# Altium PCB main.PcbDoc
Units mm, origin at the board's own origin, x right, y up, seen from the top; angles counter-clockwise.
Board outline 60 x 60 mm, 4 copper layers (Top Layer 1, Top Layer, Bottom Layer, Bottom Layer 1), stack 1.564 mm thick; 70 components, 83 nets, 299 pads, 35 vias.
Unrouted connection lines stored in the file: 109.
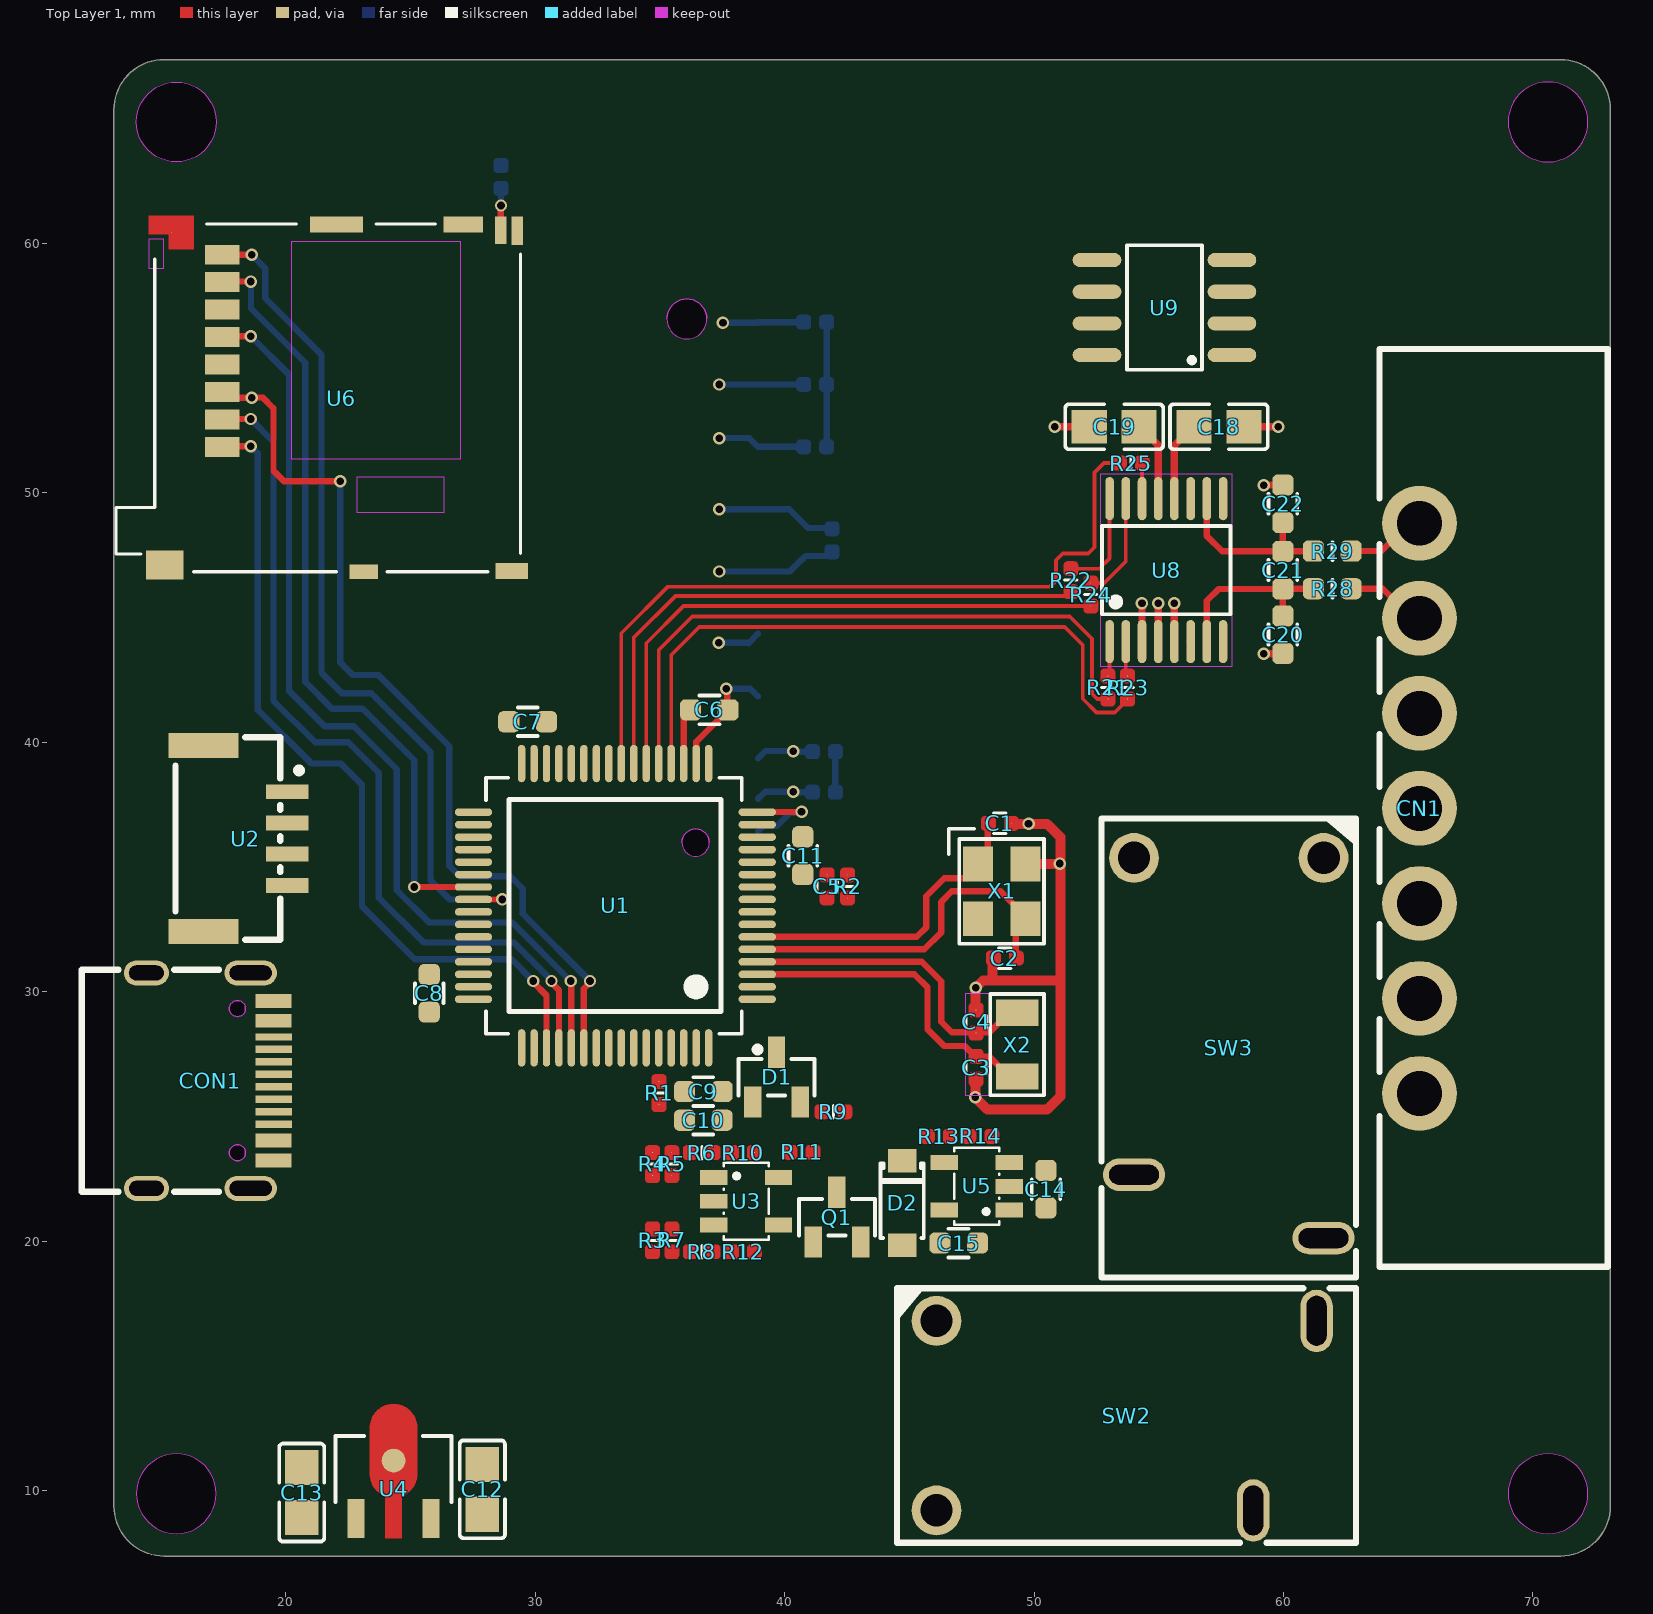
[diagram p0: Top Layer 1 view]
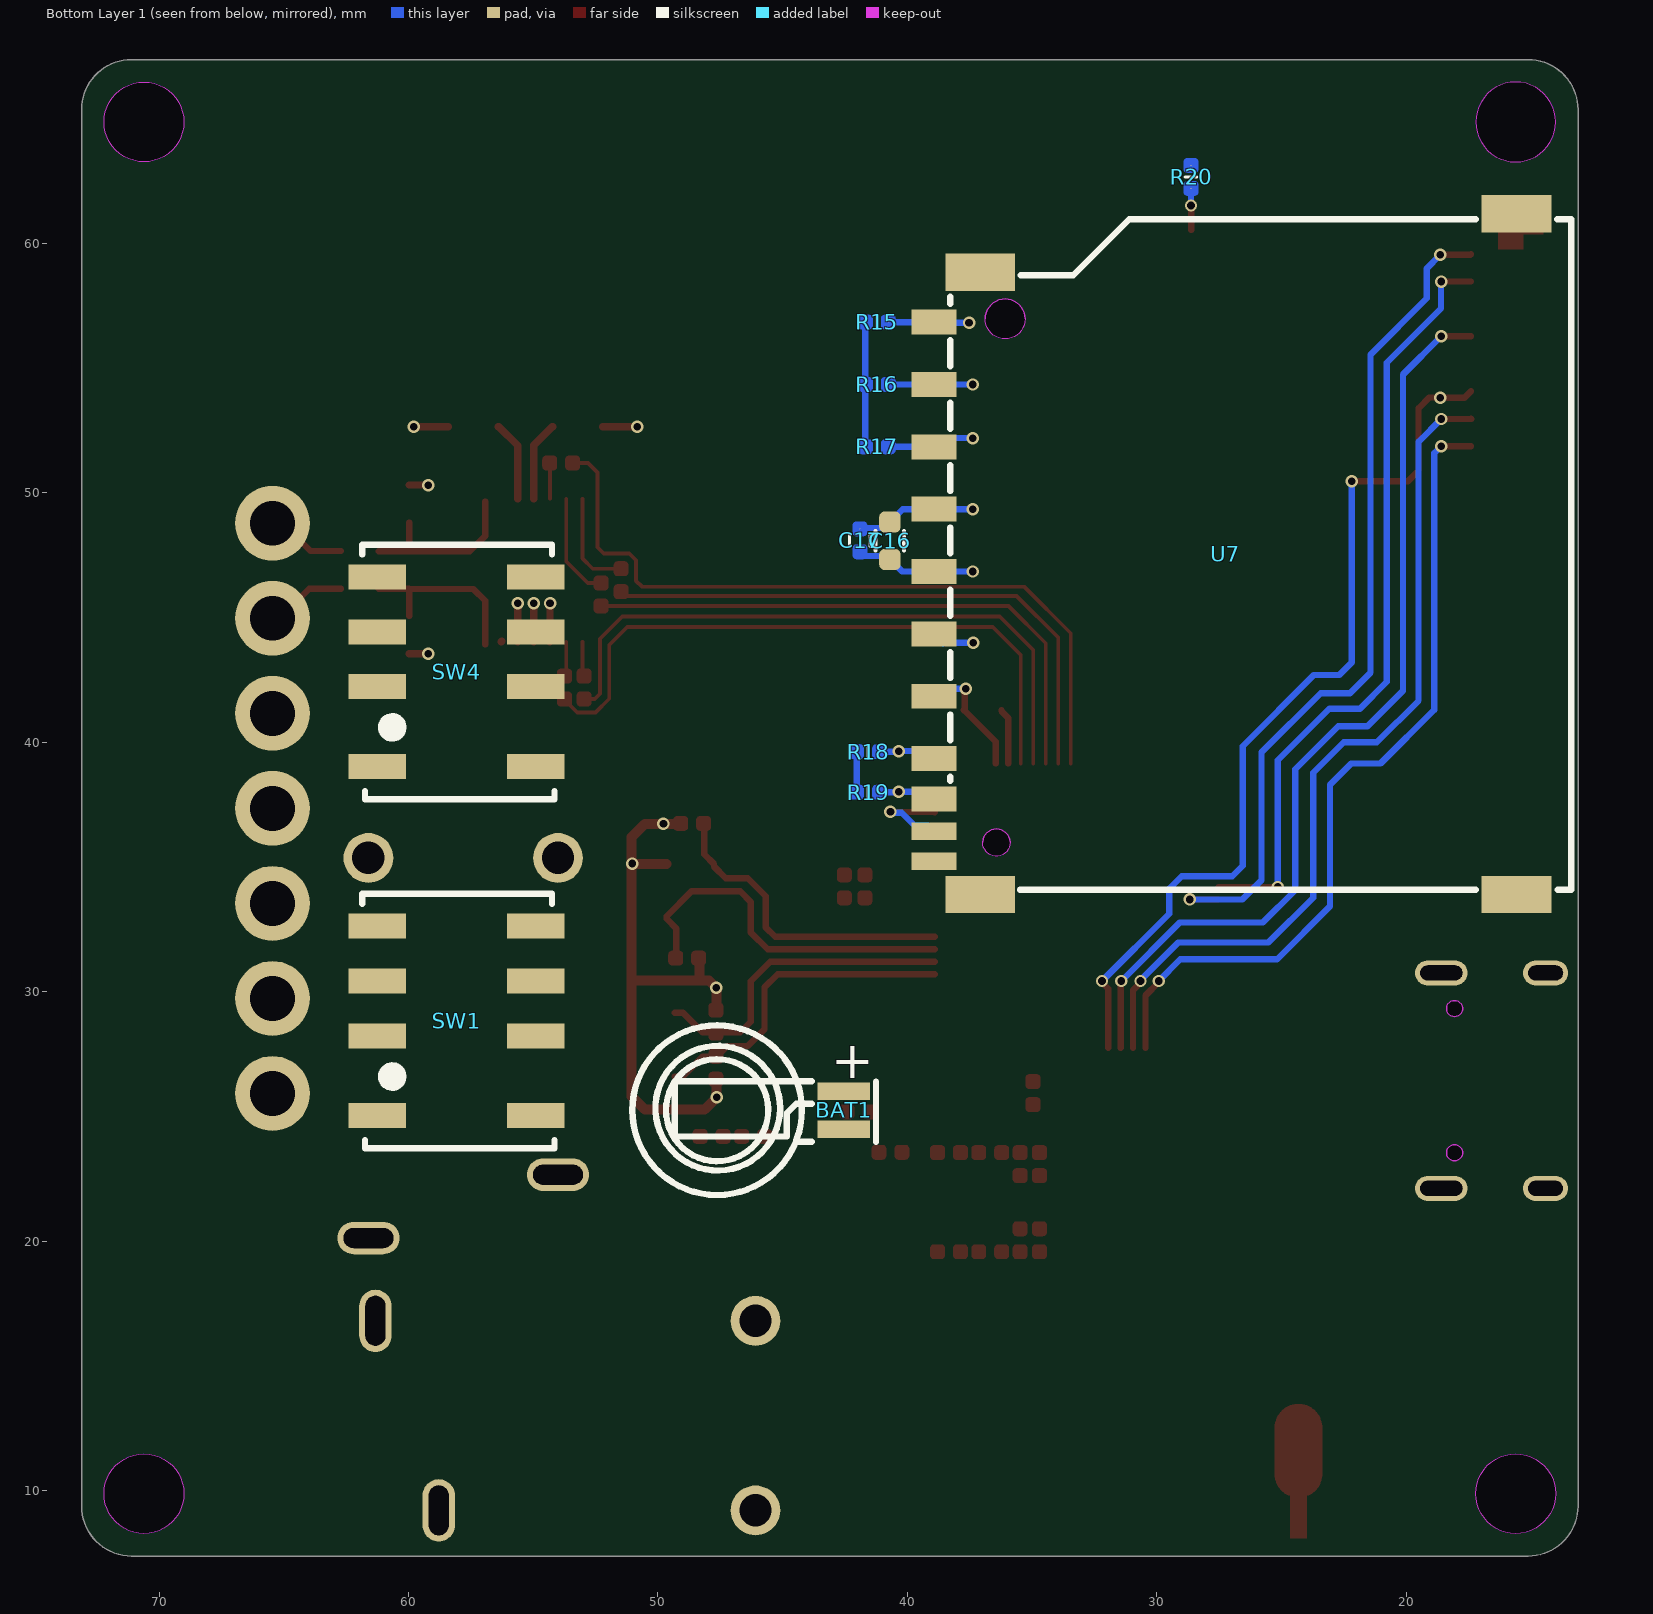
[diagram p1: Bottom Layer 1 view, seen from below]
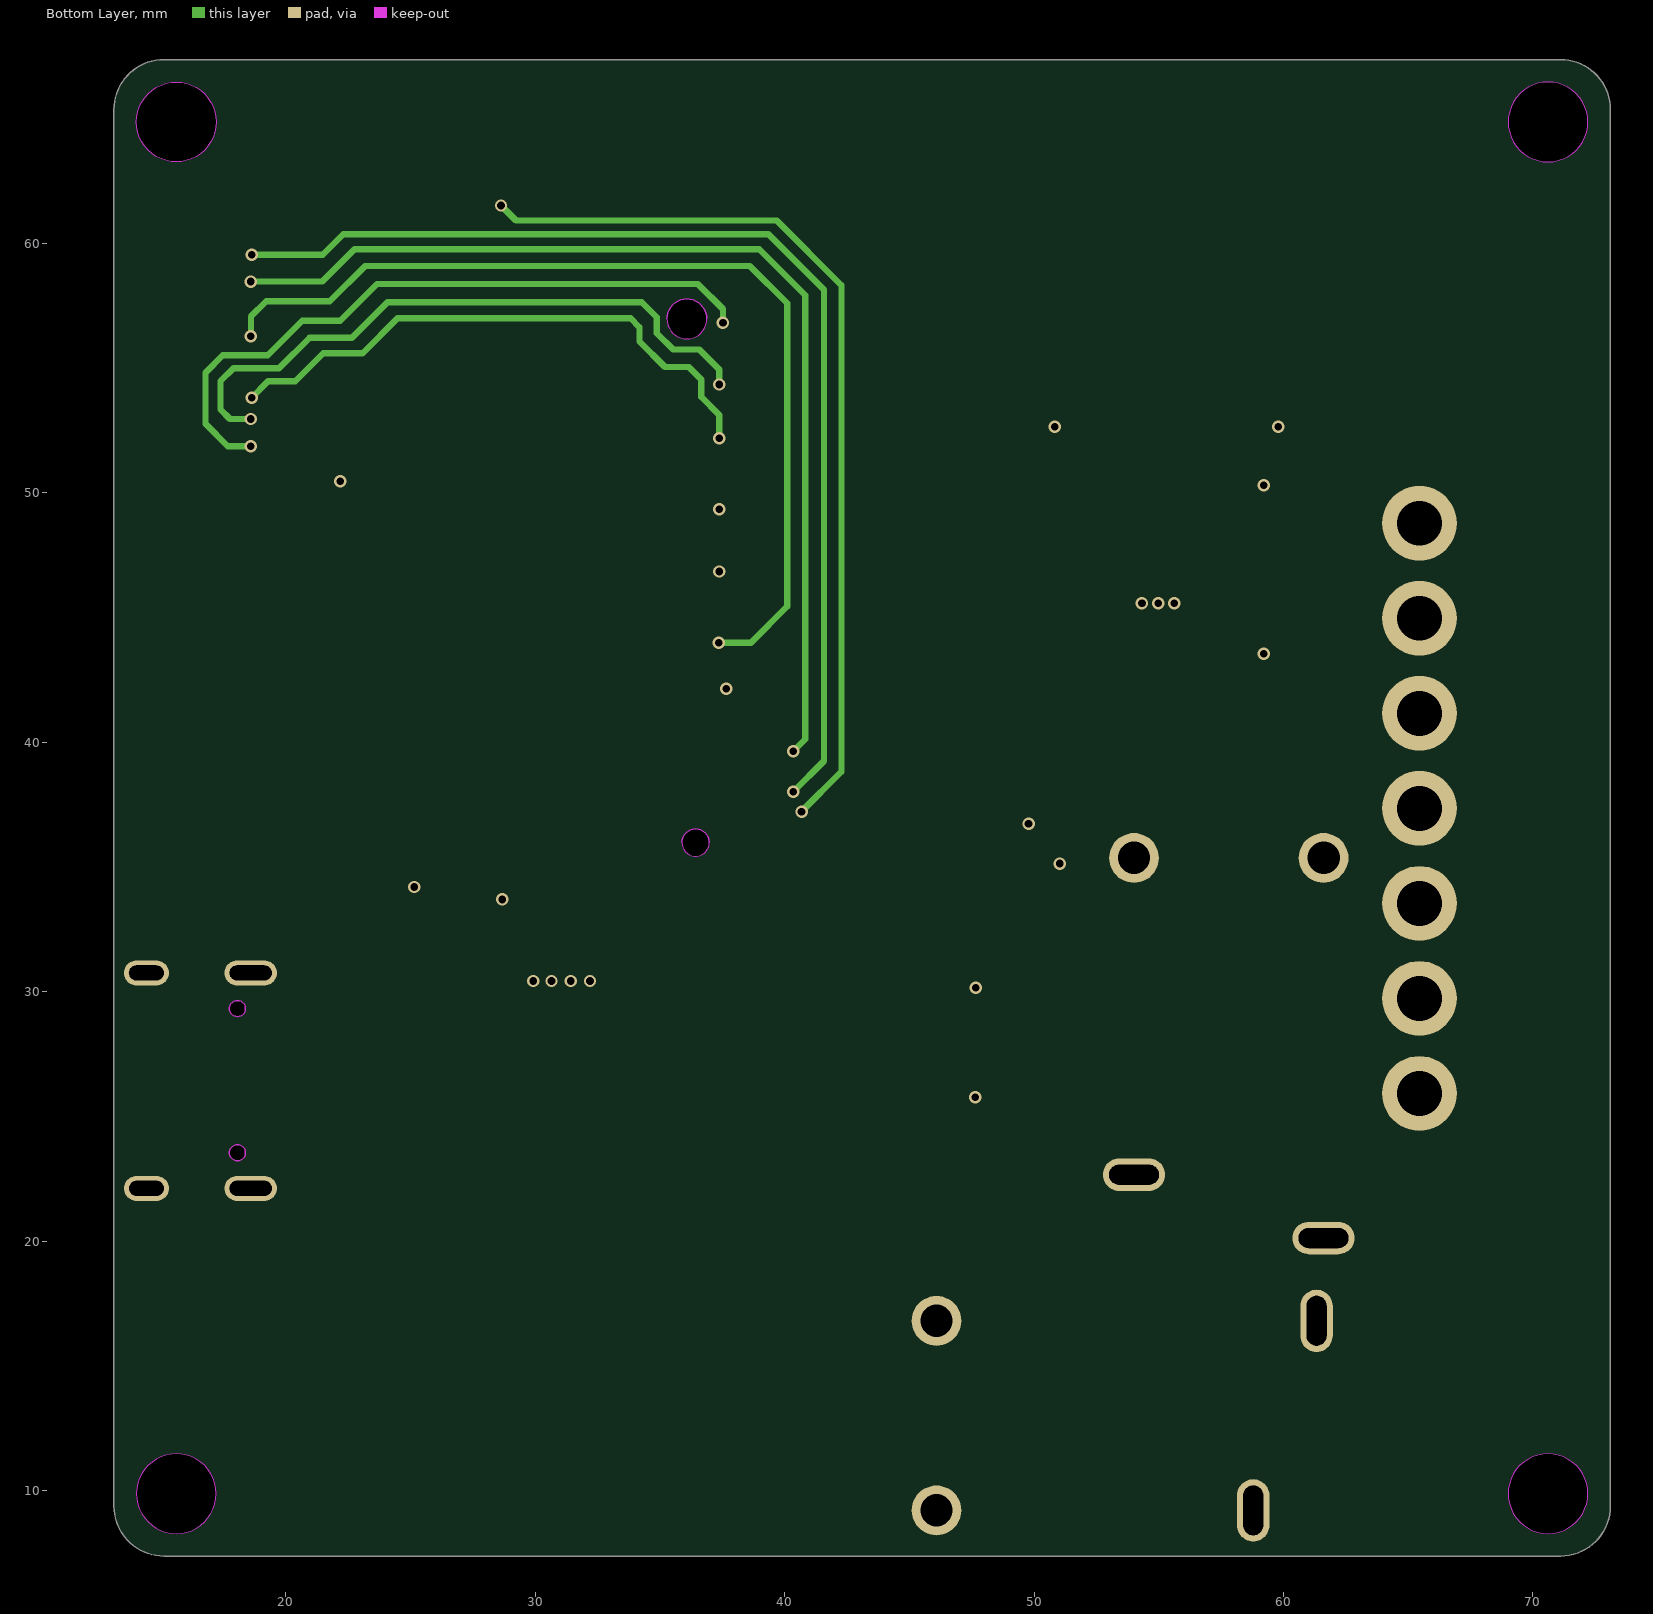
[diagram p2: Bottom Layer]
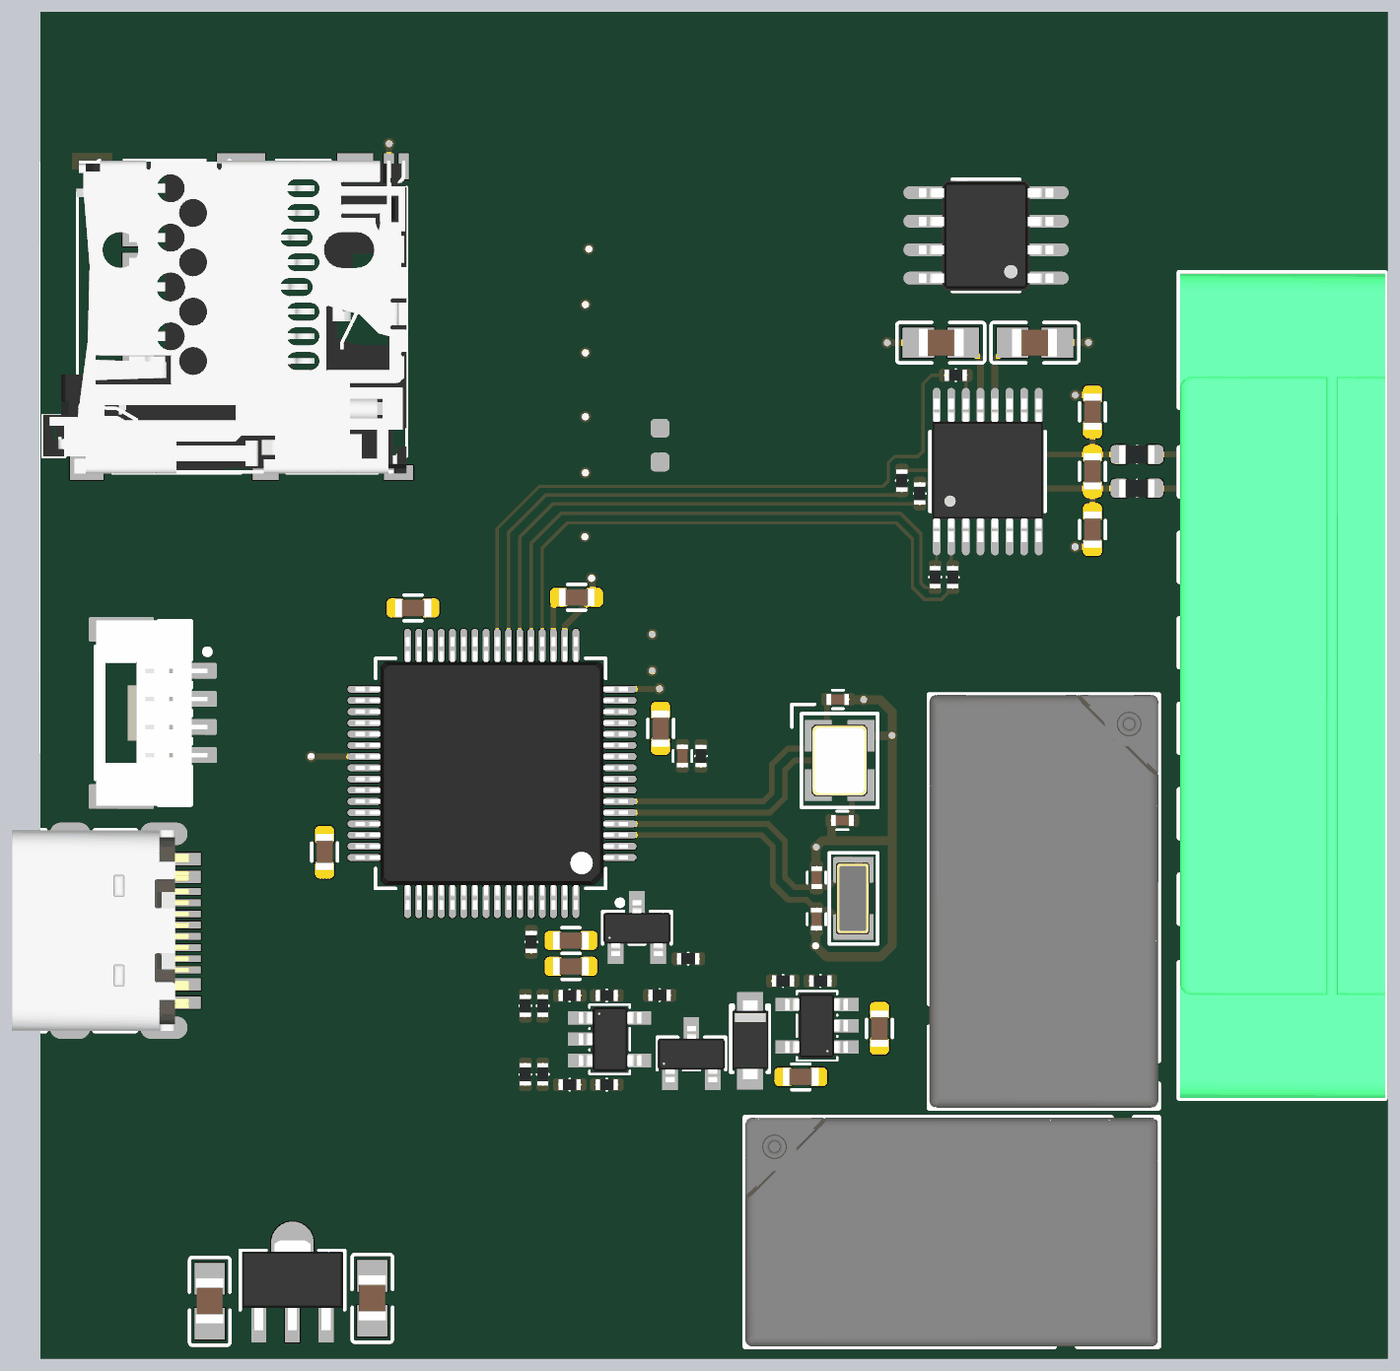
[diagram p3: 3D render of the assembled board from above, using the file's embedded part models]
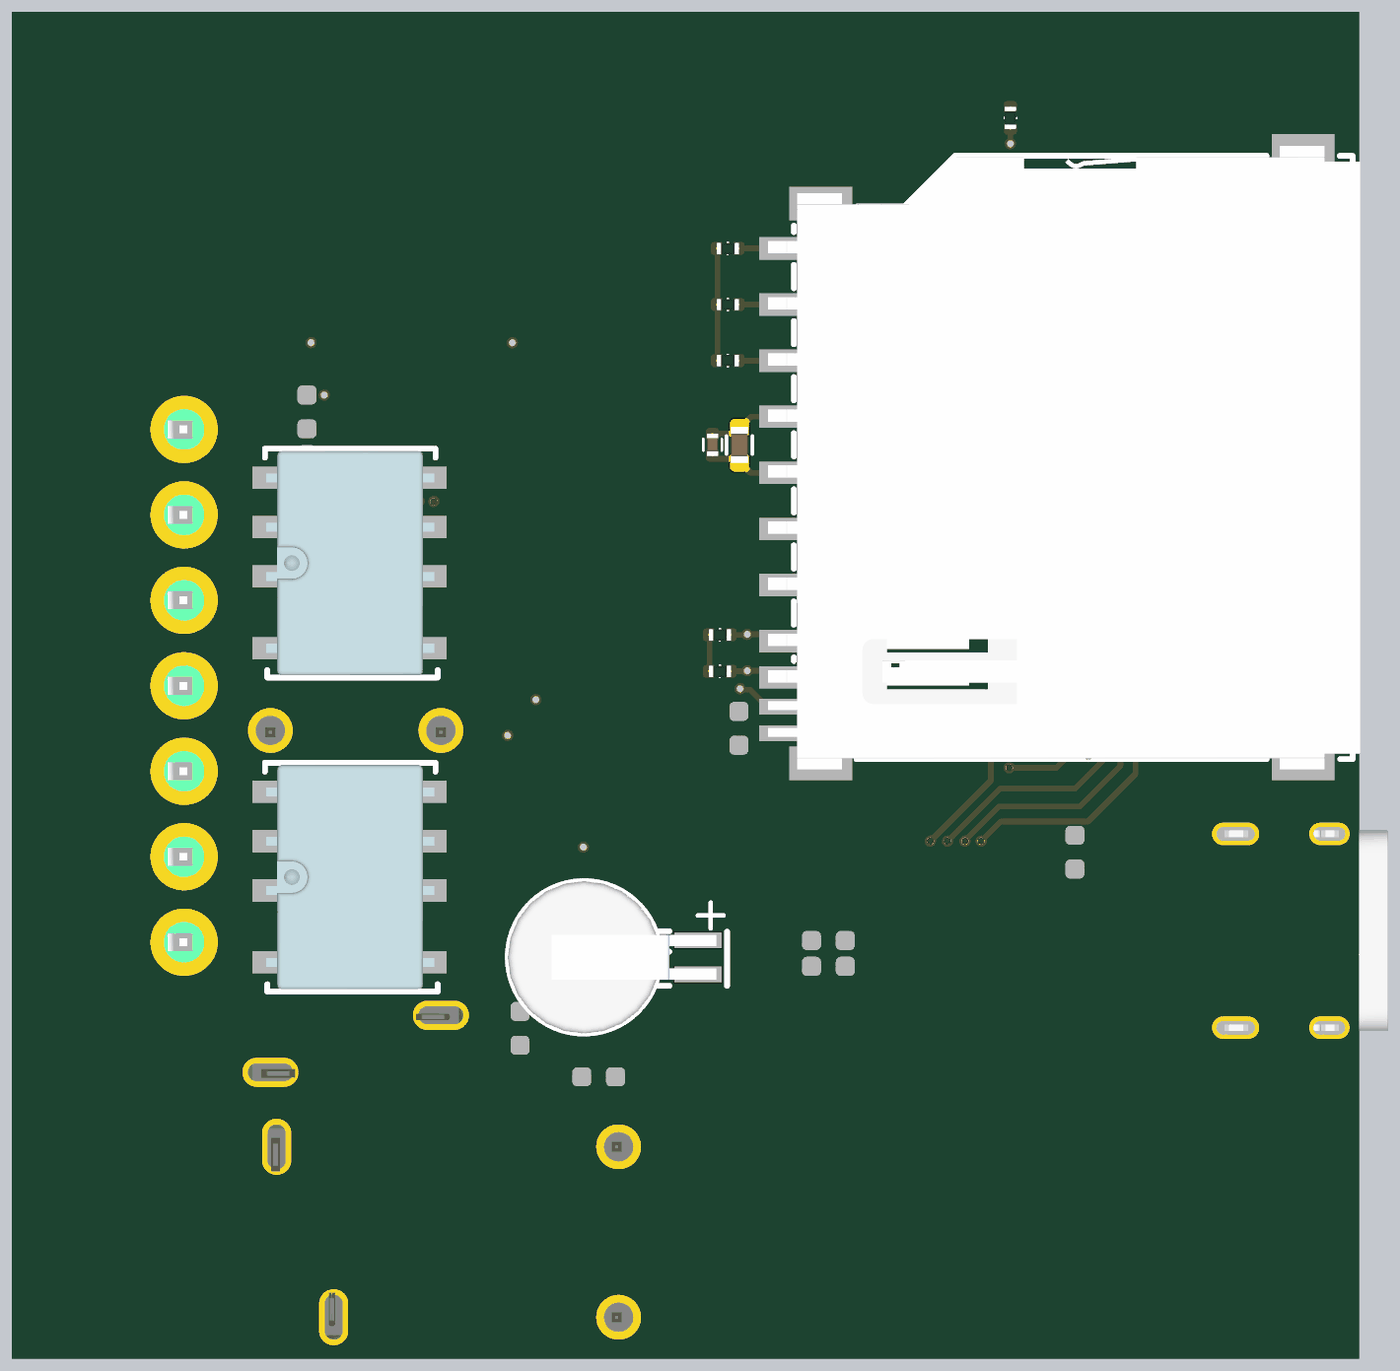
[diagram p4: 3D render of the assembled board from below, using the file's embedded part models]

## Layer stack, top to bottom
Top Solder: solder mask 0.01, Solder Resist, Dk 3.5
Top Layer 1: signal copper 0.035
Dielectric 2: prepreg 0.0994, PP-006, Dk 4.1
Top Layer: signal copper 0.0152
Dielectric 1: dielectric 1.265, FR-4, Dk 4.8
Bottom Layer: signal copper 0.0152
Dielectric 3: prepreg 0.0994, PP-006, Dk 4.1
Bottom Layer 1: signal copper 0.035
Bottom Solder: solder mask 0.01, Solder Resist, Dk 3.5

## Board outline
13.107,9.375 ccw(c15.107,9.375) 15.107,7.375 71.107,7.375 ccw(c71.107,9.375) 73.107,9.375 73.107,65.375 ccw(c71.107,65.375) 71.107,67.375 15.107,67.375 ccw(c15.107,65.375) 13.107,65.375
cut-out: 14.007,9.875 ccw(c15.607,9.875) 15.607,8.275 ccw(c15.607,9.875) 17.207,9.875 ccw(c15.607,9.875) 15.607,11.475 ccw(c15.607,9.875)
cut-out: 14.007,9.875 ccw(c15.607,9.875) 15.607,8.275 ccw(c15.607,9.875) 17.207,9.875 ccw(c15.607,9.875) 15.607,11.475 ccw(c15.607,9.875)
cut-out: 69.007,64.875 ccw(c70.607,64.875) 70.607,63.275 ccw(c70.607,64.875) 72.207,64.875 ccw(c70.607,64.875) 70.607,66.475 ccw(c70.607,64.875)
cut-out: 69.007,9.875 ccw(c70.607,9.875) 70.607,8.275 ccw(c70.607,9.875) 72.207,9.875 ccw(c70.607,9.875) 70.607,11.475 ccw(c70.607,9.875)
cut-out: 15.607,63.275 cw(c15.607,64.875) 14.007,64.875 cw(c15.607,64.875) 15.607,66.475 cw(c15.607,64.875) 17.207,64.875 cw(c15.607,64.875)
cut-out: 69.007,64.875 ccw(c70.607,64.875) 70.607,63.275 ccw(c70.607,64.875) 72.207,64.875 ccw(c70.607,64.875) 70.607,66.475 ccw(c70.607,64.875)
cut-out: 69.007,9.875 ccw(c70.607,9.875) 70.607,8.275 ccw(c70.607,9.875) 72.207,9.875 ccw(c70.607,9.875) 70.607,11.475 ccw(c70.607,9.875)
cut-out: 15.607,63.275 cw(c15.607,64.875) 14.007,64.875 cw(c15.607,64.875) 15.607,66.475 cw(c15.607,64.875) 17.207,64.875 cw(c15.607,64.875)

## Design rules (kind name [scope] priority, off if disabled: settings)
Clearance [All] p1: gap=0.152 ignorepadtopadclearanceinfootprint=FALSE
DiffPairsRouting [All] p1: maxlimit=0.254 minlimit=0.152 mostfreqgap=0.152 toplayer_minwidth=0.381 toplayer_maxwidth=0.381 toplayer_prefwidth=0.381 midlayer1_minwidth=0.381 midlayer1_maxwidth=0.381 midlayer1_prefwidth=0.381 midlayer2_minwidth=0.381 midlayer2_maxwidth=0.381 midlayer2_prefwidth=0.381 bottomlayer_minwidth=0.381 bottomlayer_maxwidth=0.381 bottomlayer_prefwidth=0.381 maxuncoupledlength=12.7
MinimumSolderMaskSliver [All] p1: minsoldermaskwidth=0.152
PolygonConnect [All] p1: connectstyle=Relief reliefconductorwidth=0.254 reliefentries=4 polygonreliefangle="90 Angle" airgapwidth=0.254
RoutingVias [All] p1: holewidth=0.305 width=0.45 viastyle="Through Hole" minholewidth=0.305 minwidth=0.45 maxholewidth=0.711 maxwidth=1.27
SilkToSilkClearance [All] p1: silktosilkclearance=0.152
SolderMaskExpansion [IsVia] p1: expansion=0.102 istentingtop=TRUE
SupplyNets "Schematic Supply Nets_3" [InNet('RTC_POWER')] p1: voltage=0.000
SupplyNets "Schematic Supply Nets_2" [InNet('3V3')] p2: voltage=0.000
SupplyNets "Schematic Supply Nets_1" [InNet('5V')] p3: voltage=0.000
SupplyNets "Schematic Supply Nets" [InNet('GND')] p4: voltage=0.000
Width [All] p1: maxlimit=0.5 minlimit=0.124 preferedwidth=0.254
27 further rules are at their usual default settings.

## Classes and differential pairs
component class power: C12 C13 U4

## Components (designator, comment, footprint, x,y, rotation, side; value= is the part's Value field where it differs from the comment)
BAT1 "MS621FE-FL11E" SMD_FL11E 51.725,25.275 r180 bottom
C1 "12pF" C_0402 48.6,36.724 r0 top
C2 "12pF" C_0402 48.8,31.325 r0 top
C3 "12pF" C_0402 47.7,26.928 r90 top
C4 "12pF" C_0402 47.65,28.831 r270 top
C5 "100nF" C_0402 41.725,34.201 r90 top
C6 "100nF" C_0603 36.988,41.3 r180 top
C7 "100nF" C_0603 29.7,40.825 r180 top
C8 "100nF" C_0603 25.75,29.95 r270 top
C9 "100nF" C_0603 36.725,26 r0 top
C10 "4.7uF" C_0603 36.725,24.85 r0 top
C11 "100nF" C_0603 40.725,35.45 r90 top
C12 "10uF" C_0805 27.873,10.062 r270 top
C13 "10uF" C_0805 20.63,9.933 r270 top
C14 "1uF" C_0603 50.475,22.075 r90 top
C15 "1uF" C_0603 46.966,19.925 r0 top
C16 "10uF" C_0603 40.7,48.093 r270 bottom
C17 "100nF" C_0402 41.875,48.075 r90 bottom
C18 "100nF" C_0805 57.395,52.65 r0 top
C19 "100nF" C_0805 53.225,52.656 r180 top
C20 "4.7nF" C_0603 59.975,44.325 r270 top
C21 "47nF" C_0603 59.975,46.914 r270 top
C22 "4.7nF" C_0603 59.975,49.575 r270 top
CN1 "WJ15EDGRM-3.81-7P" WJ15EDGRM-3.81-7P 65.45,37.355 r90 top locked
CON1 "Type-C-16Pin" Type-C-16Pin 16,26.525 r270 top
D1 "BAT54C" SOT-23 39.675,26.45 r270 top
D2 "DSK14" SOD-123FL 44.725,21.575 r270 top
Q1 "SI2305" SOT-23 42.1,20.837 r270 top
R1 "10K" R_0402 34.961,25.934 r90 top
R2 "10K" R_0402 42.525,34.228 r270 top
R3 "150R" R_0402 34.7,20.032 r90 top
R4 "390R" R_0402 34.7,23.087 r90 top
R5 "15K" R_0402 35.475,23.087 r90 top
R6 "4K7" R_0402 36.678,23.55 r180 top
R7 "1K1" R_0402 35.475,20.038 r270 top
R8 "27K" R_0402 36.678,19.575 r180 top
R9 "200K" R_0402 41.95,25.188 r0 top
R10 "100K" R_0402 38.325,23.55 r0 top
R11 "100K" R_0402 40.675,23.563 r0 top
R12 "100K" R_0402 38.325,19.575 r0 top
R13 "4.3K" R_0402 46.175,24.2 r0 top
R14 "2.7K" R_0402 47.85,24.2 r180 top
R15 "47K" R_0402 41.225,56.85 r180 bottom
R16 "47K" R_0402 41.225,54.35 r180 bottom
R17 "47K" R_0402 41.225,51.85 r180 bottom
R18 "47K" R_0402 41.575,39.625 r180 bottom
R19 "47K" R_0402 41.575,38 r180 bottom
R20 "47K" R_0402 28.625,62.675 r270 bottom
R21 "47K" R_0402 52.959,42.203 r270 top
R22 "47K" R_0402 51.475,46.5 r90 top
R23 "47K" R_0402 53.745,42.2 r270 top
R24 "47K" R_0402 52.275,45.925 r90 top
R25 "47K" R_0402 53.875,51.2 r0 top
R28 "330R" R_0603 61.95,46.151 r0 top
R29 "330R" R_0603 61.95,47.659 r0 top
SW1 "HFD4-X-S" HFD4-X-S 58.075,28.8 r90 bottom
SW2 "HF32FV-16/5-HLTF(590)" HF32FV-16/5-HLTF(590) 53.65,13.125 r0 top
SW3 "HF32FV-16/5-HLTF(590)" HF32FV-16/5-HLTF(590) 57.925,27.801 r270 top
SW4 "HFD4-X-S" HFD4-X-S 58.075,42.8 r90 bottom
U1 "STM32F103R" LQFP_64 33.2,33.45 r90 top
U2 "GH1.25-4PL" GH1.25-4PL 17.925,36.05 r90 top
U3 "LMV331" SOT-23-5P 38.525,21.625 r180 top
U4 "AMS1117-3.3" SOT-89-3P 24.317,11.205 r270 top
U5 "RT9043GB" SOT-23-5P 47.625,22.175 r0 top
U6 "2201778-1" 2201778-1 22.538,53.876 r0 top
U7 "SD" SMD_SD-102 25.825,47.5 r90 bottom locked
U8 "ADS1220IPWR" TSSOP-16 55.3,46.964 r0 top locked
U9 "REF5050AIDR" SOIC-8 55.225,57.475 r90 top
X1 "8Mhz" SMD3225-4P 48.7,34.025 r270 top
X2 "32.768Khz" SMD3215-2P 49.293,27.875 r270 top

## Footprints (in the part's own frame and the unit in brackets; to place one, negate y for a bottom-side part, rotate by r counter-clockwise, add the part's x,y. Pads: shape width x height; smd on the part's side, far side on the other; paste and mask are expansions set on the pad)
2201778-1 [mil]
  rect 55.1x31.5 smd paste+0 mask+2: 1(-200.3,-79.8) 2(-200.3,-36.5) 3(-200.3,6.8) 4(-200.3,50.2) 5(-200.3,93.5) 6(-200.3,136.8) 7(-200.3,180.1) 8(-200.3,223.4)
  rect 17.7x45.3 smd paste+0 mask+2: 9(265.2,261.4)
  rect 17.7x43.3 smd paste+0 mask+2: 10(239.3,262.4)
  round 1 smd: 11(-281,258.4)
  rect 84.3x25.6 smd paste+0 mask+2: 12(-20,271.2)
  rect 63x25.6 smd paste+0 mask+2: 13(180,271.2)
  rect 51.2x25.6 smd paste+0 mask+2: 14(256.4,-276)
  rect 45.3x23.6 smd paste+0 mask+2: 15(23.1,-277)
  rect 59.1x45.7 smd paste+0 mask+2: 16(-290.9,-266)
  Top Layer 1 region: -316.45,255.91 -284.45,255.91 -284.45,231.85 -245.55,231.85 -245.55,284.95 -316.45,284.95
  Top Layer 1 keep-out region: -316.45,201.77 -292.83,201.77 -292.83,248.23 -316.45,248.23
  Top Layer 1 keep-out region: 12.01,-183.15 149.8,-183.15 149.8,-128.03 12.01,-128.03
  Top Layer 1 keep-out region: -91.45,-98.5 176.18,-98.5 176.18,244.02 -91.45,244.02
  silkscreen extent -368,-277 270,272, body extent -368,-278 270,275, height 71
C_0402 [mm]
  round 0.025 smd mask+0.051: 1(-0.435,0.025) 2(0.485,0.025)
  Top Layer 1 region: 0.195,0.164 0.197,0.188 0.202,0.211 0.211,0.233 0.224,0.253 0.239,0.271 0.257,0.286 0.277,0.299 0.299,0.308 0.322,0.313 0.346,0.315 0.624,0.315 0.648,0.313 0.671,0.308 0.693,0.299 0.713,0.286 0.731,0.271 0.746,0.253 0.759,0.233 0.768,0.211 0.773,0.188 0.775,0.164 0.775,-0.114 0.773,-0.138 0.768,-0.161 0.759,-0.183 0.746,-0.203 0.731,-0.221 0.713,-0.236 0.693,-0.249 0.671,-0.258 0.648,-0.263 0.624,-0.265 0.346,-0.265 0.322,-0.263 0.299,-0.258 0.277,-0.249 0.257,-0.236 0.239,-0.221 0.224,-0.203 0.211,-0.183 0.202,-0.161 0.197,-0.138 0.195,-0.114 0.195,0.164
  Top Layer 1 region: -0.725,0.164 -0.723,0.188 -0.718,0.211 -0.709,0.233 -0.696,0.253 -0.681,0.271 -0.663,0.286 -0.643,0.299 -0.621,0.308 -0.598,0.313 -0.574,0.315 -0.296,0.315 -0.272,0.313 -0.249,0.308 -0.227,0.299 -0.207,0.286 -0.189,0.271 -0.174,0.253 -0.161,0.233 -0.152,0.211 -0.147,0.188 -0.145,0.164 -0.145,-0.114 -0.147,-0.138 -0.152,-0.161 -0.161,-0.183 -0.174,-0.203 -0.189,-0.221 -0.207,-0.236 -0.227,-0.249 -0.249,-0.258 -0.272,-0.263 -0.296,-0.265 -0.574,-0.265 -0.598,-0.263 -0.621,-0.258 -0.643,-0.249 -0.663,-0.236 -0.681,-0.221 -0.696,-0.203 -0.709,-0.183 -0.718,-0.161 -0.723,-0.138 -0.725,-0.114 -0.725,0.164
  silkscreen extent -0.22,-0.39 0.28,0.44, body extent -0.47,-0.22 0.53,0.28, height 0.5
C_0603 [mm]
  rrect50% 0.85x0.85 smd paste-100 mask+0.051: 1(0.763,0) 2(-0.743,0)
  silkscreen extent -0.39,-0.58 0.41,0.57, body extent -0.8,-0.4 0.8,0.4, height 0.8
C_0805 [mil]
  rect 55.5x53.1 smd paste-99999 mask+2: 1(-38.87,0.17) 2(39.93,0.17)
  silkscreen extent -77,-35 78,36, body extent -39,-25 39,25, height 49
GH1.25-4PL [mm]
  rect 0.6x1.7 smd paste+0.051: 1(1.969,-2.122) 2(0.719,-2.122) 3(-0.531,-2.122) 4(-1.781,-2.122)
  rect 1x2.8 smd paste+0.051: 5(3.819,1.228) 6(-3.631,1.228)
  silkscreen extent -3.97,-2.71 4.16,2.35, body extent -4.03,-2.6 4.22,2.35, height 4.2
HF32FV-16/5-HLTF(590) [mil]
  round 78.7 hole 51.2: 1(-297.8,-154.3) 2(-297.8,144.9)
  oval 51.2x98.4 hole 31.5 slot 78.7 at 90 deg: 3(302.2,144.9) 4(202.2,-154.3)
  silkscreen extent -360,-206 364,196, body extent -360,-205 364,196, height 622
HFD4-X-S [mm]
  rect 1.001x2.301 smd: 1(-3.77,-3.176) 2(-0.57,-3.176) 3(1.63,-3.176) 4(3.83,-3.176) 5(3.83,3.174) 6(1.63,3.174) 7(-0.57,3.174) 8(-3.77,3.174)
  silkscreen extent -5.08,-3.93 5.13,3.77, body extent -4.97,-3.78 5.03,3.72, height 5.66
LQFP_64 [mm]
  oval 0.3x1.5 smd mask+0.05: 1(-3.75,-5.699) 2(-3.25,-5.699) 3(-2.75,-5.699) 4(-2.25,-5.699) 5(-1.75,-5.699) 6(-1.25,-5.699) 7(-0.75,-5.699) 8(-0.25,-5.699) 9(0.25,-5.699) 10(0.75,-5.699) 11(1.25,-5.699) 12(1.75,-5.699) 13(2.25,-5.699) 14(2.75,-5.699) 15(3.25,-5.699) 16(3.75,-5.699) 33(3.75,5.677) 34(3.25,5.677) 35(2.75,5.677) 36(2.25,5.677) 37(1.75,5.677) 38(1.25,5.677) 39(0.75,5.677) 40(0.25,5.677) 41(-0.25,5.677) 42(-0.75,5.677) 43(-1.25,5.677) 44(-1.75,5.677) 45(-2.25,5.677) 46(-2.75,5.677) 47(-3.25,5.677) 48(-3.75,5.677)
  oval 1.5x0.3 smd mask+0.05: 17(5.7,-3.749) 18(5.7,-3.249) 19(5.7,-2.749) 20(5.7,-2.249) 21(5.7,-1.749) 22(5.7,-1.249) 23(5.7,-0.749) 24(5.7,-0.249) 25(5.7,0.251) 26(5.7,0.751) 27(5.7,1.251) 28(5.7,1.751) 29(5.7,2.251) 30(5.7,2.751) 31(5.7,3.251) 32(5.7,3.751) 49(-5.7,3.751) 50(-5.7,3.251) 51(-5.7,2.751) 52(-5.7,2.251) 53(-5.7,1.751) 54(-5.7,1.251) 55(-5.7,0.751) 56(-5.7,0.251) 57(-5.7,-0.249) 58(-5.7,-0.749) 59(-5.7,-1.249) 60(-5.7,-1.749) 61(-5.7,-2.249) 62(-5.7,-2.749) 63(-5.7,-3.249) 64(-5.7,-3.749)
  silkscreen extent -5.88,-5.82 5.13,5.18, body extent -6.07,-6.07 6.07,6.07, height 1.62
R_0402 [mil]
  round 1 smd mask+2.01: 1(18.23,0.01) 2(-17.99,0.01)
  Top Layer 1 region: -6.58,-5.47 -6.65,-6.4 -6.87,-7.31 -7.22,-8.17 -7.71,-8.96 -8.31,-9.67 -9.02,-10.28 -9.82,-10.76 -10.68,-11.12 -11.58,-11.34 -12.51,-11.41 -23.47,-11.41 -24.4,-11.34 -25.31,-11.12 -26.17,-10.76 -26.96,-10.28 -27.67,-9.67 -28.28,-8.96 -28.76,-8.17 -29.12,-7.31 -29.34,-6.4 -29.41,-5.47 -29.41,5.49 -29.34,6.41 -29.12,7.32 -28.76,8.18 -28.28,8.98 -27.67,9.68 -26.96,10.29 -26.17,10.78 -25.31,11.13 -24.4,11.35 -23.47,11.42 -12.51,11.42 -11.58,11.35 -10.68,11.13 -9.82,10.78 -9.02,10.29 -8.31,9.68 -7.71,8.98 -7.22,8.18 -6.87,7.32 -6.65,6.41 -6.58,5.49 -6.58,-5.47
  Top Layer 1 region: 29.64,-5.47 29.57,-6.4 29.35,-7.31 29,-8.17 28.51,-8.96 27.91,-9.67 27.2,-10.28 26.4,-10.76 25.54,-11.12 24.64,-11.34 23.71,-11.41 12.75,-11.41 11.82,-11.34 10.91,-11.12 10.05,-10.76 9.26,-10.28 8.55,-9.67 7.94,-8.96 7.46,-8.17 7.1,-7.31 6.88,-6.4 6.81,-5.47 6.81,5.49 6.88,6.41 7.1,7.32 7.46,8.18 7.94,8.98 8.55,9.68 9.26,10.29 10.05,10.78 10.91,11.13 11.82,11.35 12.75,11.42 23.71,11.42 24.64,11.35 25.54,11.13 26.4,10.78 27.2,10.29 27.91,9.68 28.51,8.98 29,8.18 29.35,7.32 29.57,6.41 29.64,5.49 29.64,-5.47
  silkscreen extent 0,-10 0,10, body extent -20,-10 20,10, height 14
R_0603 [mil]
  rrect50% 33.5x33.5 smd paste-3937 mask+2: 1(-29.56,0.38) 2(29.84,0.38)
  silkscreen extent 0,-14 0,14, body extent -31,-16 31,16, height 18
SMD3215-2P [mm]
  rect 1.05x1.7 smd paste+0.051: 1(-1.28,0.028) 2(1.27,0.028)
  silkscreen extent -2.03,-1.05 2.02,1.11, body extent -1.6,-0.75 1.6,0.75, height 0.93
SMD3225-4P [mm]
  rect 1.4x1.199 smd: 1(-1.1,-0.95) 2(1.1,-0.95) 3(1.1,0.95) 4(-1.1,0.95)
  silkscreen extent -2.51,-2.12 2.1,1.7, body extent -1.6,-1.25 1.6,1.25, height 0.64
SMD_FL11E [mm]
  rect 2.1x0.7 smd paste+0 mask+0.05: 1(9.179,0.737) 2(9.179,-0.787)
  silkscreen extent 0.7,-3.42 10.47,3.38, body extent 0.71,-3.42 10,3.38, height 2.8
SMD_SD-102 [mil]
  rect 39.4x70.9 smd: 1(269.6,515.8) 2(171.2,515.8) 3(72.8,515.8) 4(-25.6,515.8) 5(-124.1,515.8) 6(-222.5,515.8) 7(-320.9,515.8) 8(-384.7,515.8) 9(368.1,515.8)
  rect 27.6x70.9 smd: 10(-435.9,515.8) 11(-483.1,515.8)
  rect 59.1x110.2 smd: 12(-535.5,443) 13(446.8,443) 14(539.3,-403.5) 15(-535.5,-403.5)
  Keep-Out Layer board cut-out: 404.7,403.6 404.3,398.7 403.2,393.9 401.3,389.3 398.7,385.1 395.5,381.4 391.7,378.1 387.5,375.6 382.9,373.7 378.1,372.5 373.2,372.1 368.3,372.5 363.5,373.7 358.9,375.6 354.7,378.1 350.9,381.4 347.7,385.1 345.1,389.3 343.2,393.9 342.1,398.7 341.7,403.6 342.1,408.5 343.2,413.4 345.1,417.9 347.7,422.1 350.9,425.9 354.7,429.1 358.9,431.7 363.5,433.6 368.3,434.7 373.2,435.1 378.1,434.7 382.9,433.6 387.5,431.7 391.7,429.1 395.5,425.9 398.7,422.1 401.3,417.9 403.2,413.4 404.3,408.5 404.7,403.6
  Keep-Out Layer board cut-out: -431.9,417.4 -432.3,413.3 -433.5,409.4 -435.4,405.7 -437.9,402.5 -441,399.8 -444.6,397.7 -448.5,396.4 -452.6,395.8 -456.7,396 -460.7,396.9 -464.4,398.6 -467.8,401 -470.6,404 -472.8,407.5 -474.4,411.3 -475.1,415.3 -475.1,419.5 -474.4,423.5 -472.8,427.3 -470.6,430.8 -467.8,433.8 -464.4,436.2 -460.7,437.9 -456.7,438.8 -452.6,439 -448.5,438.4 -444.6,437.1 -441,435 -437.9,432.3 -435.4,429.1 -433.5,425.4 -432.3,421.5 -431.9,417.4
  Keep-Out Layer region: 404.7,403.6 404.3,398.7 403.2,393.9 401.3,389.3 398.7,385.1 395.5,381.4 391.7,378.1 387.5,375.6 382.9,373.7 378.1,372.5 373.2,372.1 368.3,372.5 363.5,373.7 358.9,375.6 354.7,378.1 350.9,381.4 347.7,385.1 345.1,389.3 343.2,393.9 342.1,398.7 341.7,403.6 342.1,408.5 343.2,413.4 345.1,417.9 347.7,422.1 350.9,425.9 354.7,429.1 358.9,431.7 363.5,433.6 368.3,434.7 373.2,435.1 378.1,434.7 382.9,433.6 387.5,431.7 391.7,429.1 395.5,425.9 398.7,422.1 401.3,417.9 403.2,413.4 404.3,408.5 404.7,403.6
  Keep-Out Layer region: 404.7,403.6 404.3,398.7 403.2,393.9 401.3,389.3 398.7,385.1 395.5,381.4 391.7,378.1 387.5,375.6 382.9,373.7 378.1,372.5 373.2,372.1 368.3,372.5 363.5,373.7 358.9,375.6 354.7,378.1 350.9,381.4 347.7,385.1 345.1,389.3 343.2,393.9 342.1,398.7 341.7,403.6 342.1,408.5 343.2,413.4 345.1,417.9 347.7,422.1 350.9,425.9 354.7,429.1 358.9,431.7 363.5,433.6 368.3,434.7 373.2,435.1 378.1,434.7 382.9,433.6 387.5,431.7 391.7,429.1 395.5,425.9 398.7,422.1 401.3,417.9 403.2,413.4 404.3,408.5 404.7,403.6
  Keep-Out Layer region: -431.9,417.4 -432.3,413.3 -433.5,409.4 -435.4,405.7 -437.9,402.5 -441,399.8 -444.6,397.7 -448.5,396.4 -452.6,395.8 -456.7,396 -460.7,396.9 -464.4,398.6 -467.8,401 -470.6,404 -472.8,407.5 -474.4,411.3 -475.1,415.3 -475.1,419.5 -474.4,423.5 -472.8,427.3 -470.6,430.8 -467.8,433.8 -464.4,436.2 -460.7,437.9 -456.7,438.8 -452.6,439 -448.5,438.4 -444.6,437.1 -441,435 -437.9,432.3 -435.4,429.1 -433.5,425.4 -432.3,421.5 -431.9,417.4
  Keep-Out Layer region: -431.9,417.4 -432.3,413.3 -433.5,409.4 -435.4,405.7 -437.9,402.5 -441,399.8 -444.6,397.7 -448.5,396.4 -452.6,395.8 -456.7,396 -460.7,396.9 -464.4,398.6 -467.8,401 -470.6,404 -472.8,407.5 -474.4,411.3 -475.1,415.3 -475.1,419.5 -474.4,423.5 -472.8,427.3 -470.6,430.8 -467.8,433.8 -464.4,436.2 -460.7,437.9 -456.7,438.8 -452.6,439 -448.5,438.4 -444.6,437.1 -441,435 -437.9,432.3 -435.4,429.1 -433.5,425.4 -432.3,421.5 -431.9,417.4
  Keep-Out Layer lines w0.1: 373.2,372.1 368.3,372.5 363.5,373.7 358.9,375.6 354.7,378.1 350.9,381.4 347.7,385.1 345.1,389.3 343.2,393.9 342.1,398.7 341.7,403.6 342.1,408.5 343.2,413.4 345.1,417.9 347.7,422.1 350.9,425.9 354.7,429.1 358.9,431.7 363.5,433.6 368.3,434.7 373.2,435.1 378.1,434.7 382.9,433.6 387.5,431.7 391.7,429.1 395.5,425.9 398.7,422.1 401.3,417.9 403.2,413.4 404.3,408.5 404.7,403.6 404.3,398.7 403.2,393.9 401.3,389.3 398.7,385.1 395.5,381.4 391.7,378.1 387.5,375.6 382.9,373.7 378.1,372.5 373.2,372.1 ; -452.6,395.8 -456.7,396 -460.7,396.9 -464.4,398.6 -467.8,401 -470.6,404 -472.8,407.5 -474.4,411.3 -475.1,415.3 -475.1,419.5 -474.4,423.5 -472.8,427.3 -470.6,430.8 -467.8,433.8 -464.4,436.2 -460.7,437.9 -456.7,438.8 -452.6,439 -448.5,438.4 -444.6,437.1 -441,435 -437.9,432.3 -435.4,429.1 -433.5,425.4 -432.3,421.5 -431.9,417.4 -432.3,413.3 -433.5,409.4 -435.4,405.7 -437.9,402.5 -441,399.8 -444.6,397.7 -448.5,396.4 -452.6,395.8
  silkscreen extent -528,-490 531,490, body extent -546,-504 548,535, height 118
SOD-123FL [mm]
  rect 0.95x1.151 smd: 1(-1.65,-0.015) 2(1.736,-0.015)
  silkscreen extent -1.54,-0.88 1.45,0.85, body extent -1.75,-0.8 1.75,0.8, height 1.1
SOIC-8 [mm]
  oval 0.569x1.951 smd: 1(-1.946,-2.708) 2(-0.676,-2.708) 3(0.594,-2.708) 4(1.864,-2.708) 5(1.864,2.703) 6(0.594,2.703) 7(-0.676,2.703) 8(-1.946,2.703)
  silkscreen extent -2.54,-1.5 2.46,1.5, body extent -2.5,-3 2.4,3, height 1.75
SOT-23 [mm]
  rect 1.25x0.701 smd: 1(0.877,-0.953) 2(0.877,0.947) 3(-1.122,-0.003)
  silkscreen extent -0.85,-1.53 0.61,1.52, body extent -1.35,-1.5 1.15,1.5, height 1.2
SOT-23-5P [mil]
  rect 43.3x23.6 smd: 1(54,-36.4) 2(54,1) 3(54,38.4) 4(-48.3,38.4) 5(-48.3,-36.4)
  silkscreen extent -33,-60 38,62, body extent -53,-56 57,58, height 61
SOT-89-3P [mil]
  rect 62x26.5 smd: 1(91.5,-59.1) 3(91.5,59)
  round 37.4 smd: 2(0,0)
  Top Layer 1 region: -51.8,37.4 21.2,37.4 22.9,37.3 24.7,37.2 26.4,37 28.2,36.7 29.9,36.3 31.6,35.9 33.2,35.4 34.9,34.8 36.5,34.1 38.1,33.3 39.6,32.5 41.1,31.6 42.6,30.6 44,29.6 45.4,28.5 46.7,27.3 47.9,26.1 49.1,24.8 50.3,23.5 51.3,22.1 52.3,20.7 53.3,19.2 54.1,17.6 54.9,16.1 55.7,13 122.5,13 122.5,-13 55.7,-13 54.9,-16.1 54.1,-17.7 53.3,-19.2 52.3,-20.7 51.3,-22.2 50.3,-23.5 49.1,-24.9 47.9,-26.2 46.7,-27.4 45.4,-28.6 44,-29.7 42.6,-30.7 41.1,-31.7 39.6,-32.6 38.1,-33.4 36.5,-34.1 34.9,-34.8 33.2,-35.4 31.6,-36 29.9,-36.4 28.2,-36.8 26.4,-37.1 24.7,-37.3 22.9,-37.4 21.2,-37.4 -51.8,-37.4 -53.6,-37.4 -55.3,-37.3 -57.1,-37.1 -58.8,-36.8 -60.5,-36.4 -62.2,-36 -63.9,-35.4 -65.5,-34.8 -67.1,-34.1 -68.7,-33.4 -70.3,-32.6 -71.8,-31.7 -73.2,-30.7 -74.6,-29.7 -76,-28.6 -77.3,-27.4 -78.6,-26.2 -79.8,-24.9 -80.9,-23.5 -82,-22.2 -83,-20.7 -83.9,-19.2 -84.8,-17.7 -85.6,-16.1 -86.3,-14.5 -86.9,-12.9 -87.5,-11.3 -88,-9.6 -88.4,-7.9 -88.7,-6.1 -89,-4.4 -89.1,-2.7 -89.2,-0.9 -89.2,0.8 -89.1,2.6 -89,4.3 -88.7,6.1 -88.4,7.8 -88,9.5 -87.5,11.2 -86.9,12.9 -86.3,14.5 -85.6,16.1 -84.8,17.6 -83.9,19.2 -83,20.7 -82,22.1 -80.9,23.5 -79.8,24.8 -78.6,26.1 -77.3,27.3 -76,28.5 -74.6,29.6 -73.2,30.6 -71.8,31.6 -70.3,32.5 -68.7,33.3 -67.1,34.1 -65.5,34.8 -63.9,35.4 -62.2,35.9 -60.5,36.3 -58.8,36.7 -57.1,37 -55.3,37.2 -53.6,37.3 -51.8,37.4
  silkscreen extent -39,-92 66,92, body extent -56,-89 101,89, height 60
TSSOP-16 [mil]
  oval 13.5x68.2 smd: 1(-89.5,-115.2) 2(-63.9,-115.2) 3(-38.3,-115.2) 4(-12.7,-115.2) 5(12.8,-115.2) 6(38.4,-115.2) 7(64,-115.2) 8(89.6,-115.2) 9(89.6,110.5) 10(64,110.5) 11(38.4,110.5) 12(12.8,110.5) 13(-12.7,110.5) 14(-38.3,110.5) 15(-63.9,110.5) 16(-89.5,110.5)
  silkscreen extent -101,-72 101,67, body extent -98,-126 98,126, height 43
Type-C-16Pin [mil]
  oval 39.4x82.7 hole 23.6 slot 66.9 at 90 deg: 1(-166.5,101.9) 2(173.6,101.9)
  oval 39.4x70.9 hole 23.6 slot 55.1 at 90 deg: 3(-166.5,-62.7) 4(173.6,-62.6)
  rect 21.7x57.1 smd paste-3937 mask+2: A1B12(-122.4,138.1) A4B9(-90.9,138.1) B1A12(129.5,138.1) B4A9(98,138.1)
  rect 11.8x57.1 smd paste-3937 mask+2: A5(-45.7,138.2) A6(-6.3,138.2) A7(13.4,138.2) A8(52.8,138.2) B5(72.4,138.2) B6(33.1,138.2) B7(-26,138.2) B8(-65.4,138.2)
  Keep-Out Layer board cut-out: -97.4,81 -97.8,78 -98.9,75.1 -100.7,72.6 -103,70.5 -105.7,69.1 -108.7,68.3 -111.8,68.3 -114.8,69.1 -117.5,70.5 -119.8,72.6 -121.6,75.1 -122.7,78 -123,81 -122.7,84.1 -121.6,87 -119.8,89.5 -117.5,91.6 -114.8,93 -111.8,93.7 -108.7,93.7 -105.7,93 -103,91.6 -100.7,89.5 -98.9,87 -97.8,84.1 -97.4,81
  Keep-Out Layer board cut-out: 130.1,81 129.7,78 128.7,75.1 126.9,72.6 124.6,70.5 121.9,69.1 118.9,68.3 115.8,68.3 112.8,69.1 110.1,70.5 107.7,72.6 106,75.1 104.9,78 104.5,81 104.9,84.1 106,87 107.7,89.5 110.1,91.6 112.8,93 115.8,93.7 118.9,93.7 121.9,93 124.6,91.6 126.9,89.5 128.7,87 129.7,84.1 130.1,81
  Keep-Out Layer region: -97.4,81 -97.8,78 -98.9,75.1 -100.7,72.6 -103,70.5 -105.7,69.1 -108.7,68.3 -111.8,68.3 -114.8,69.1 -117.5,70.5 -119.8,72.6 -121.6,75.1 -122.7,78 -123,81 -122.7,84.1 -121.6,87 -119.8,89.5 -117.5,91.6 -114.8,93 -111.8,93.7 -108.7,93.7 -105.7,93 -103,91.6 -100.7,89.5 -98.9,87 -97.8,84.1 -97.4,81
  Keep-Out Layer region: -97.4,81 -97.8,78 -98.9,75.1 -100.7,72.6 -103,70.5 -105.7,69.1 -108.7,68.3 -111.8,68.3 -114.8,69.1 -117.5,70.5 -119.8,72.6 -121.6,75.1 -122.7,78 -123,81 -122.7,84.1 -121.6,87 -119.8,89.5 -117.5,91.6 -114.8,93 -111.8,93.7 -108.7,93.7 -105.7,93 -103,91.6 -100.7,89.5 -98.9,87 -97.8,84.1 -97.4,81
  Keep-Out Layer region: 130.1,81 129.7,78 128.7,75.1 126.9,72.6 124.6,70.5 121.9,69.1 118.9,68.3 115.8,68.3 112.8,69.1 110.1,70.5 107.7,72.6 106,75.1 104.9,78 104.5,81 104.9,84.1 106,87 107.7,89.5 110.1,91.6 112.8,93 115.8,93.7 118.9,93.7 121.9,93 124.6,91.6 126.9,89.5 128.7,87 129.7,84.1 130.1,81
  Keep-Out Layer region: 130.1,81 129.7,78 128.7,75.1 126.9,72.6 124.6,70.5 121.9,69.1 118.9,68.3 115.8,68.3 112.8,69.1 110.1,70.5 107.7,72.6 106,75.1 104.9,78 104.5,81 104.9,84.1 106,87 107.7,89.5 110.1,91.6 112.8,93 115.8,93.7 118.9,93.7 121.9,93 124.6,91.6 126.9,89.5 128.7,87 129.7,84.1 130.1,81
  Keep-Out Layer region: -119.8,72.6 -117.5,70.5 -114.8,69.1 -111.8,68.3 -108.7,68.3 -105.7,69.1 -103,70.5 -100.7,72.6 -98.9,75.1 -97.8,78 -97.4,81 -97.8,84.1 -98.9,87 -100.7,89.5 -103,91.6 -105.7,93 -108.7,93.7 -111.8,93.7 -114.8,93 -117.5,91.6 -119.8,89.5 -121.6,87 -122.7,84.1 -123,81 -122.7,78 -121.6,75.1
  Keep-Out Layer region: 107.7,72.6 110.1,70.5 112.8,69.1 115.8,68.3 118.9,68.3 121.9,69.1 124.6,70.5 126.9,72.6 128.7,75.1 129.7,78 130.1,81 129.7,84.1 128.7,87 126.9,89.5 124.6,91.6 121.9,93 118.9,93.7 115.8,93.7 112.8,93 110.1,91.6 107.7,89.5 106,87 104.9,84.1 104.5,81 104.9,78 106,75.1
  Keep-Out Layer lines w0.1: 118.9,68.3 121.9,69.1 ; 118.9,68.3 115.8,68.3 ; 118.9,68.3 115.8,68.3 ; 118.9,68.3 121.9,69.1 ; 115.8,68.3 112.8,69.1 ; 115.8,68.3 112.8,69.1 ; -108.7,68.3 -105.7,69.1 ; -108.7,68.3 -111.8,68.3 ; -108.7,68.3 -111.8,68.3 ; -108.7,68.3 -105.7,69.1 ; -111.8,68.3 -114.8,69.1 ; -111.8,68.3 -114.8,69.1 ; 121.9,69.1 124.6,70.5 ; 121.9,69.1 124.6,70.5 ; 112.8,69.1 110.1,70.5 ; 112.8,69.1 110.1,70.5 ; -105.7,69.1 -103,70.5 ; -105.7,69.1 -103,70.5 ; -114.8,69.1 -117.5,70.5 ; -114.8,69.1 -117.5,70.5 ; 124.6,70.5 126.9,72.6 ; 124.6,70.5 126.9,72.6 ; 110.1,70.5 107.7,72.6 ; 110.1,70.5 107.7,72.6 ; -103,70.5 -100.7,72.6 ; -103,70.5 -100.7,72.6 ; -117.5,70.5 -119.8,72.6 ; -117.5,70.5 -119.8,72.6 ; 126.9,72.6 128.7,75.1 ; 126.9,72.6 128.7,75.1 ; 107.7,72.6 106,75.1 ; 107.7,72.6 106,75.1 ; -100.7,72.6 -98.9,75.1 ; -100.7,72.6 -98.9,75.1 ; -119.8,72.6 -121.6,75.1 ; -119.8,72.6 -121.6,75.1 ; 128.7,75.1 129.7,78 ; 128.7,75.1 129.7,78 ; 106,75.1 104.9,78 ; 106,75.1 104.9,78 ; -98.9,75.1 -97.8,78 ; -98.9,75.1 -97.8,78 ; -121.6,75.1 -122.7,78 ; -121.6,75.1 -122.7,78 ; 129.7,78 130.1,81 ; 129.7,78 130.1,81 ; 104.9,78 104.5,81 ; 104.9,78 104.5,81 ; -97.8,78 -97.4,81 ; -97.8,78 -97.4,81 ; -122.7,78 -123,81 ; -122.7,78 -123,81 ; 130.1,81 129.7,84.1 ; 130.1,81 129.7,84.1 ; 104.5,81 104.9,84.1 ; 104.5,81 104.9,84.1 ; -97.4,81 -97.8,84.1 ; -97.4,81 -97.8,84.1 ; -123,81 -122.7,84.1 ; -123,81 -122.7,84.1 ; 129.7,84.1 128.7,87 ; 129.7,84.1 128.7,87 ; 104.9,84.1 106,87 ; 104.9,84.1 106,87 ; -97.8,84.1 -98.9,87 ; -97.8,84.1 -98.9,87 ; -122.7,84.1 -121.6,87 ; -122.7,84.1 -121.6,87 ; 128.7,87 126.9,89.5 ; 128.7,87 126.9,89.5 ; 106,87 107.7,89.5 ; 106,87 107.7,89.5 ; -98.9,87 -100.7,89.5 ; -98.9,87 -100.7,89.5 ; -121.6,87 -119.8,89.5 ; -121.6,87 -119.8,89.5 ; 126.9,89.5 124.6,91.6 ; 126.9,89.5 124.6,91.6 ; 107.7,89.5 110.1,91.6 ; 107.7,89.5 110.1,91.6 ; -100.7,89.5 -103,91.6 ; -100.7,89.5 -103,91.6 ; -119.8,89.5 -117.5,91.6 ; -119.8,89.5 -117.5,91.6 ; 124.6,91.6 121.9,93 ; 124.6,91.6 121.9,93 ; 110.1,91.6 112.8,93 ; 110.1,91.6 112.8,93 ; -103,91.6 -105.7,93 ; -103,91.6 -105.7,93 ; -117.5,91.6 -114.8,93 ; -117.5,91.6 -114.8,93 ; 121.9,93 118.9,93.7 ; 121.9,93 118.9,93.7 ; 112.8,93 115.8,93.7 ; 112.8,93 115.8,93.7 ; -105.7,93 -108.7,93.7 ; -105.7,93 -108.7,93.7 ; -114.8,93 -111.8,93.7 ; -114.8,93 -111.8,93.7 ; 118.9,93.7 115.8,93.7 ; 118.9,93.7 115.8,93.7 ; -108.7,93.7 -111.8,93.7 ; -108.7,93.7 -111.8,93.7
  silkscreen extent -172,-165 179,52, body extent -173,-166 180,145, height 126
WJ15EDGRM-3.81-7P [mm]
  round 3 hole 1.801: 1(-11.43,0) 2(-7.62,0) 3(-3.81,0) 4(0,0) 5(3.81,0) 6(7.62,0) 7(11.43,0)
  silkscreen extent -18.37,-7.55 18.41,1.6, body extent -18.37,-7.57 18.37,1.57, height 7.3

## Part data
C1 C2 C3 C4 C5 C6 C7 C8 C9 C10 C11 C12 C13 C14 C15 C16 C17 C18 C19 C20 C21 C22: library part C_MLCC
D1: "SOT-23"
Q1: "p-mos"
R1 R2 R3 R4 R5 R6 R7 R8 R9 R10 R11 R12 R13 R14 R15 R16 R17 R18 R19 R20 R21 R22 R23 R24 R25 R28 R29: library part R_SMD
SW1 SW2 SW3 SW4: "继电器"
U1: library part STM32F103Rx, "64-pin LQFP"
U3: library part LMV331IDBVR, "LMV331IDBVR"
U5: "LDO"
U6: "TF卡槽"
U7: library part 长体SD卡槽, "长体SD卡槽"
U8: "24Bit ADC"
X1: library part Crystal_SMD3225-4P
X2: library part Crystal_3215-2P

## Via types
v1: diameter 0.5, hole 0.305, Top Layer 1 to Bottom Layer 1, tented both sides, 35 vias

## Nets (pads, with @x,y where several pads share a name; then routed paths per layer and width w, separated by ;. In a path a pad name is that pad's centre, name@x,y a point inside that pad or via, vN(x,y) a via of type N, cw(c..) or ccw(c..) an arc to the next point about the centre after c; other vN are vias at no path point)
3V3: C6.1 C7.1 C8.1 C9.1 C10.1 C11.1 C13.1 C16.1 C17.1 D1.1 R2.2 R3.1 R11.2 R15.2 R16.2 R17.2 R18.2 R19.2 R20.2 U1.13 U1.19 U1.32 U1.48 U1.64 U3.5 U4.2 U6.4 U7.4 | length 13.7
  Top Layer 1 w0.254: U1.19 35.949,40.978 36.225,41.254 C6.1
  Bottom Layer 1 w0.254: v1(37.375,46.85) U7.4 40.208,46.85 40.688,47.33 C16.1 40.845,47.475 41.735,47.475 C17.1 ; R17.2 R15.2 ; R19.2 R18.2
5V: C12.1 C14.2 C18.1 C19.1 U4.3 U5.1 U5.3 U8.12 U8.13 | length 6.4
  Top Layer 1 w0.3: C19.1 54.243,52.652 54.977,51.917 U8.13 ; U8.12 55.625,51.902 56.377,52.654 C18.1
ADS_CS: R23.1 U1.20 | length 26
  Top Layer 1 w0.15: U1.20 35.449,43.499 36.57,44.62 51.23,44.62 51.95,43.9 51.95,41.75 52.5,41.2 53.232,41.2 53.745,41.713 R23.1
ADS_DRDY: R25.2 U1.24 | length 30.3
  Top Layer 1 w0.15: U1.24 33.449,44.374 35.318,46.243 50.643,46.243 50.875,46.475 50.875,47.3 51.15,47.575 52.175,47.575 52.425,47.825 52.425,50.825 52.8,51.2 R25.2
AIN0: SW4.4 SW4.5 U8.11
AIN1: C21.2 C22.1 R29.1 U8.10 | length 7.1
  Top Layer 1 w0.254: U8.10@56.926,49.657 56.926,48.274 57.542,47.658 C21.2 ; C22.1 C21.2 ; R29.1 61.194,47.663 59.981,47.663 C21.2
AIN2: C20.2 C21.1 R28.1 U8.7 | length 7.3
  Top Layer 1 w0.254: U8.7@56.926,43.924 56.926,45.676 57.401,46.151 C21.1 ; C20.2 C21.1 ; R28.1 61.194,46.156 59.98,46.156 C21.1
GND: BAT1.2 C1.2 C2.1 C3.1 C4.1 C5.2 C6.2 C7.2 C8.2 C9.2 C10.2 C11.2 C12.2 C13.2 C14.1 C15.1 C16.2 C17.2 C18.2 C19.2 C20.1 C22.2 R1.2 R12.1 R14.2 SW3.4 U1.12 U1.18 U1.31 U1.47 U1.63 U3.2 U4.1 U5.2 U6.6 U6.9 U6.11 U6.12 U6.13 U6.14 U6.15 U6.16 U7.3 U7.6 U7.12 U7.13 U7.14 U7.15 U8.3 U8.4 U8.5 U8.8 X1.2 X1.4 | length 42.6
  Top Layer 1 w0.254: U1.18 36.458,39.159 36.458,40.026 C6.2 ; v1(37.65,42.15) 37.691,42.109 37.691,41.284 C6.2@37.703,41.272 ; v1(54.325,45.573) v1@54.325,45.575 ; U8.4@54.975,44.04 U8.4
  Top Layer 1 w0.3: v1(50.825,52.65) 52.209,52.65 C19.2 ; v1(54.325,45.573) v1(54.325,45.573) 54.326,44.039 U8.3 ; U8.4 v1(54.977,45.573) ; U8.5 v1(55.625,45.573) ; C18.2 v1(59.793,52.654) ; v1(59.2,43.55) 59.206,43.556 59.969,43.556 C20.1 ; v1@59.212,50.318 C22.2
  Top Layer 1 w0.4: 47.65,26.468 47.65,25.75 48.125,25.275 50.525,25.275 51.05,25.8 51.05,30.45 ; 47.65,29.291 47.65,30.15 47.95,30.45 48.34,30.45 ; 48.34,31.325 48.34,30.45 ; 49.06,36.724 50.526,36.724 51.05,36.2 v1@51.05,35.125 ; X1.4 v1@51.05,35.125 ; 48.34,30.45 51.05,30.45 ; 51.05,30.45 v1@51.05,35.125
  Bottom Layer 1 w0.254: v1(37.375,49.349) U7.3 40.188,49.349 40.945,48.592 41.868,48.592 C17.2 ; v1(37.65,42.15) 38.625,42.15 U7.6
  other v1: 47.634,25.766 47.659,30.166 51.034,35.141 49.777,36.74 59.206,50.313
NetC1_1: C1.1 U1.6 X1.1 | length 12.6
  Top Layer 1 w0.254: U1.6 45.3,32.2 45.675,32.575 45.675,33.825 46.402,34.552 47.278,34.552 47.75,35.024 X1.1 48.14,35.515 48.14,36.724
NetC2_2: C2.2 U1.5 X1.3 | length 14.7
  Top Layer 1 w0.254: U1.5 45.6,31.7 46.275,32.375 46.275,33.6 46.7,34.025 48.65,34.025 49.65,33.026 X1.3 49.26,32.535 49.26,31.325
NetC3_2: C3.2 U1.3 X2.2 | length 13.1
  Top Layer 1 w0.254: U1.3 45.2,30.7 45.725,30.175 45.725,28.5 46.4,27.825 47.213,27.825 47.65,27.388 48.212,27.388 48.995,26.605 X2.2
NetC4_2: C4.2 U1.4 X2.1 | length 12.9
  Top Layer 1 w0.254: U1.4 45.5,31.2 46.275,30.425 46.275,28.8 46.704,28.371 47.65,28.371 48.212,28.371 48.995,29.155 X2.1
NetC5_1: C5.1 R2.1 U1.7
NetC15_2: C15.2 D2.2 R13.2 U5.5
NetCN1_1: CN1.1 SW1.2 SW1.7 SW2.3 SW4.3 SW4.6
NetCN1_2: CN1.2 SW1.3 SW1.6 SW3.3
NetCN1_6: CN1.6 R28.2 | length 3.2
  Top Layer 1 w0.254: R28.2 63.976,46.161 65.163,44.975 CN1.6 CN1.6@65.445,44.98
NetCN1_7: CN1.7 R29.2 | length 3.2
  Top Layer 1 w0.25: R29.2 63.914,47.669 65.03,48.785 CN1.7 CN1.7@65.442,48.793
NetD1_3: D1.3 U1.1
NetD2_1: D2.1 Q1.2
NetQ1_1: Q1.1 R10.1 R11.1 U3.4
NetQ1_3: Q1.3 R9.1
NetR1_1: R1.1 U1.60
NetR3_2: R3.2 R7.2
NetR4_2: R4.2 R5.2
NetR5_1: R5.1 R6.1
NetR6_2: R6.2 R10.2 U3.1
NetR7_1: R7.1 R8.1
NetR8_2: R8.2 R12.2 U3.3
NetR13_1: R13.1 R14.1 U5.4
NetR21_2: R21.2 U8.1 | length 1.4
  Top Layer 1 w0.15: R21.2 53.027,42.728 U8.1
NetR22_1: R22.1 U8.16 | length 5.8
  Top Layer 1 w0.15: R22.1 52.613,46.963 53.027,47.377 U8.16 53.027,48.102
NetR23_2: R23.2 U8.2 | length 1.4
  Top Layer 1 w0.15: U8.2 53.677,42.725 R23.2
NetR24_1: R24.1 U8.15 | length 4.3
  Top Layer 1 w0.15: R24.1 52.813,46.388 53.677,47.252 U8.15
NetR25_1: R25.1 U8.14 | length 1.4
  Top Layer 1 w0.15: U8.14 54.327,51.189 R25.1
NetU1_46: U1.46 U2.2
NetU1_49: U1.49 U2.1
PA0: U1.14
PA1: U1.15
PA3: U1.17
PA8: U1.41
PA9: U1.42
PA10: U1.43
PA11: U1.44
PA12: U1.45
PA15: U1.50
PB0: U1.26
PB1: U1.27
PB2: U1.28
PB3: U1.55
PB4: U1.56
PB5: U1.57
PB6: U1.58
PB7: U1.59
PB8: U1.61
PB9: U1.62
PB10: U1.29
PB11: U1.30
PB12: U1.33
PB13: U1.34
PB14: U1.35
PB15: U1.36
PC0: U1.8
PC1: U1.9
PC2: U1.10
PC3: U1.11
PC5: U1.25
PC6: U1.37
PC7: U1.38
PC13: U1.2
REF: U8.9
RTC_POWER: BAT1.1 D1.2 R4.1 R9.2
SD_SW: R20.1 U1.16 U6.10 U7.10 | length 42.3
  Top Layer 1 w0.254: U6.10 28.62,60.545 28.62,61.52 v1(28.625,61.525) ; U1.16 38.908,37.209 40.659,37.209 v1(40.675,37.225)
  Bottom Layer w0.254: v1(28.625,61.525) 29.225,60.925 39.675,60.925 42.275,58.325 42.275,38.825 v1(40.675,37.225)
  Bottom Layer 1 w0.254: v1(28.625,61.525) R20.1 ; U7.10 39.15,36.652 39.7,36.652 40.226,37.178 40.628,37.178 v1(40.675,37.225)
SDIO_CLK: U1.53 U6.5 U7.5 | length 78.7
  Top Layer 1 w0.254: U6.5@17.4,56.277 v1(18.598,56.277) ; v1@31.426,30.424 31.44,30.41 31.44,27.759 U1.53
  Bottom Layer w0.254: v1(18.598,56.277) 18.598,57.073 19.214,57.689 21.764,57.689 23.175,59.1 38.6,59.1 40.1,57.6 40.1,45.45 38.65,44 v1(37.35,44)
  Bottom Layer 1 w0.254: v1(18.598,56.277) 20.125,54.751 20.125,42.075 21.55,40.65 22.725,40.65 24.449,38.926 24.449,34.075 25.749,32.775 29.075,32.775 v1@31.426,30.424 ; v1(37.35,44) 38.527,44 38.553,43.974 U7.5
  other v1: 31.426,30.431
SDIO_CMD: R17.1 U1.54 U6.3 U7.2 | length 63.4
  Top Layer 1 w0.254: U6.3@17.4,54.075 17.657,53.818 v1(18.625,53.818) ; v1@18.625,53.825 19.075,53.825 19.5,53.4 19.5,50.9 19.925,50.475 v1(22.175,50.475) ; U1.54 31.949,30.12 32.194,30.364 v1(32.194,30.431)
  Bottom Layer w0.254: v1(18.625,53.818) 19.282,54.475 20.375,54.475 21.5,55.6 23.075,55.6 24.475,57 33.825,57 34.175,56.65 34.175,56.075 35.2,55.05 36.15,55.05 36.65,54.55 36.65,53.85 37.375,53.125 v1(37.375,52.2)
  Bottom Layer 1 w0.254: v1(22.175,50.475) 22.175,43.2 22.675,42.7 23.7,42.7 26.55,39.85 26.55,35.05 26.975,34.625 29,34.625 29.5,34.125 29.5,33.125 v1(32.194,30.431) ; v1(37.375,52.2) 38.575,52.2 U7.2 38.928,51.85 R17.1
SDIO_D0: R18.1 U1.39 U6.7 U7.7 | length 75.6
  Top Layer 1 w0.254: U6.7@17.4,58.477 v1(18.598,58.477) ; v1(25.149,34.2) U1.39
  Bottom Layer w0.254: v1(18.598,58.477) 21.452,58.477 22.75,59.775 38.975,59.775 40.825,57.925 40.825,40.125 v1(40.35,39.65)
  Bottom Layer 1 w0.254: v1(18.598,58.477) 18.598,57.402 20.775,55.225 20.775,42.425 21.85,41.35 23.075,41.35 25.149,39.276 v1(25.149,34.2) ; U7.7 39.227,39.65 v1(40.35,39.65) 40.375,39.625 R18.1
SDIO_D1: R19.1 U1.40 U6.8 U7.8 | length 81.5
  Top Layer 1 w0.254: U6.8@17.4,59.577 17.427,59.55 v1(18.625,59.55) ; U1.40 v1(28.674,33.7)
  Bottom Layer w0.254: v1(18.625,59.55) 21.475,59.55 22.3,60.375 39.35,60.375 41.575,58.15 41.575,39.25 v1(40.35,38.025)
  Bottom Layer 1 w0.254: v1(18.625,59.55) 19.175,59 19.175,57.8 21.425,55.55 21.425,42.8 22.25,41.975 23.425,41.975 25.799,39.601 25.799,34.475 26.574,33.7 v1(28.674,33.7) ; U7.8 39.223,38.025 v1(40.35,38.025) 40.375,38 R19.1
SDIO_D2: R15.1 U1.51 U6.1 U7.9 | length 63.9
  Top Layer 1 w0.254: U6.1@17.4,51.875 v1(18.598,51.875) ; v1(29.925,30.431) 29.925,30.376 30.449,29.852 U1.51
  Bottom Layer w0.254: v1(18.598,51.875) 17.675,51.875 16.775,52.775 16.775,54.825 17.475,55.525 19.275,55.525 20.65,56.9 22.175,56.9 23.65,58.375 36.525,58.375 37.525,57.375 v1(37.525,56.825)
  Bottom Layer 1 w0.254: v1(18.598,51.875) 18.875,51.599 18.875,41.3 21.025,39.15 22.2,39.15 23.049,38.301 23.049,33.425 25.174,31.3 29.056,31.3 v1(29.925,30.431) ; v1(37.525,56.825) 38.902,56.825 U7.9 R15.1
SDIO_D3: R16.1 U1.52 U6.2 U7.1 | length 63.7
  Top Layer 1 w0.254: U6.2@17.4,52.975 17.39,52.965 v1(18.588,52.965) ; v1@30.65,30.425 30.65,30.358 30.949,30.059 U1.52
  Bottom Layer w0.254: v1(18.588,52.965) 17.76,52.965 17.375,53.35 17.375,54.475 17.9,55 19.725,55 20.95,56.225 22.65,56.225 24.075,57.65 34.275,57.65 34.875,57.05 34.875,56.4 35.525,55.75 36.575,55.75 37.375,54.95 v1(37.375,54.348)
  Bottom Layer 1 w0.254: v1(18.588,52.965) 19.5,52.053 19.5,41.675 21.175,40 22.5,40 23.724,38.776 23.724,33.775 25.524,31.975 29.13,31.975 30.65,30.455 v1(30.65,30.431) ; v1(37.375,54.348) U7.1 38.929,54.35 R16.1
SPI1_MISO: R24.2 U1.22 | length 23.3
  Top Layer 1 w0.15: U1.22 34.449,43.974 35.943,45.468 R24.2
SPI1_MOSI: R22.2 U1.23 | length 23.4
  Top Layer 1 w0.15: U1.23 33.949,44.199 35.618,45.868 51.257,45.868 51.475,46.086
SPI1_SCK: R21.1 U1.21 | length 25.8
  Top Layer 1 w0.15: U1.21 34.949,43.699 36.293,45.043 51.432,45.043 52.325,44.15 52.325,41.95 52.535,41.74 R21.1
VOUT_+: U8.6 | length 0
  Top Layer 1 w0.254: U8.6@56.263,44.051 U8.6
  Top Layer 1 w0.3: U8.6@56.269,44.044 U8.6
pads on no net: CN1.3 CN1.4 CN1.5 CON1.1 CON1.2 CON1.3 CON1.4 CON1.A1B12 CON1.A4B9 CON1.A5 CON1.A6 CON1.A7 CON1.A8 CON1.B1A12 CON1.B4A9 CON1.B5 CON1.B6 CON1.B7 CON1.B8 SW1.1 SW1.4 SW1.5 SW1.8 SW2.1 SW2.2 SW2.4 SW3.1 SW3.2 SW4.1 SW4.2 SW4.7 SW4.8 U2.3 U2.4 U2.5 U2.6 U7.11 U9.1 U9.2 U9.3 U9.4 U9.5 U9.6 U9.7 U9.8

## Keep-outs
Top Layer 1:
  region: 47.235,25.85 50.399,25.85 50.399,29.925 47.235,29.925
  region: 47.001,31.924 50.399,31.924 50.399,36.126 47.001,36.126
  region: 52.65,43.05 57.95,43.05 57.95,50.75 52.65,50.75

## Silkscreen, mask and mechanical layers (free items; w line width, h text height)
Mechanical 1:
  circle w0.1: c70.607,64.875 r2.2
  circle w0.1: c70.607,9.875 r2.2
  circle w0.1: c15.607,9.875 r2.2
  circle w0.1: c15.607,64.875 r2.2
  circle w0.013: c15.607,9.875 r1.6
  circle w0.006: c13.107,65.375 r0.003
  circle w0.013: c70.607,9.875 r1.6
  circle w0.013: c70.607,64.875 r1.6
  circle w0.013: c15.607,64.875 r1.6
  lines w0.013: 13.107,9.375 ccw(c15.107,9.375) 15.107,7.375 71.107,7.375 ccw(c71.107,9.375) 73.107,9.375 73.107,65.375 ccw(c71.107,65.375) 71.107,67.375 15.107,67.375 ccw(c15.107,65.375) 13.107,65.375 13.107,9.375

## Text inside footprints (layer, text, board x,y; h text height)
BAT1: Bottom Overlay "+" at 43.042,26.535 h1.5